# EAGLE board Artembed-Panel (EAGLE 9.5.0), part 1 of 3
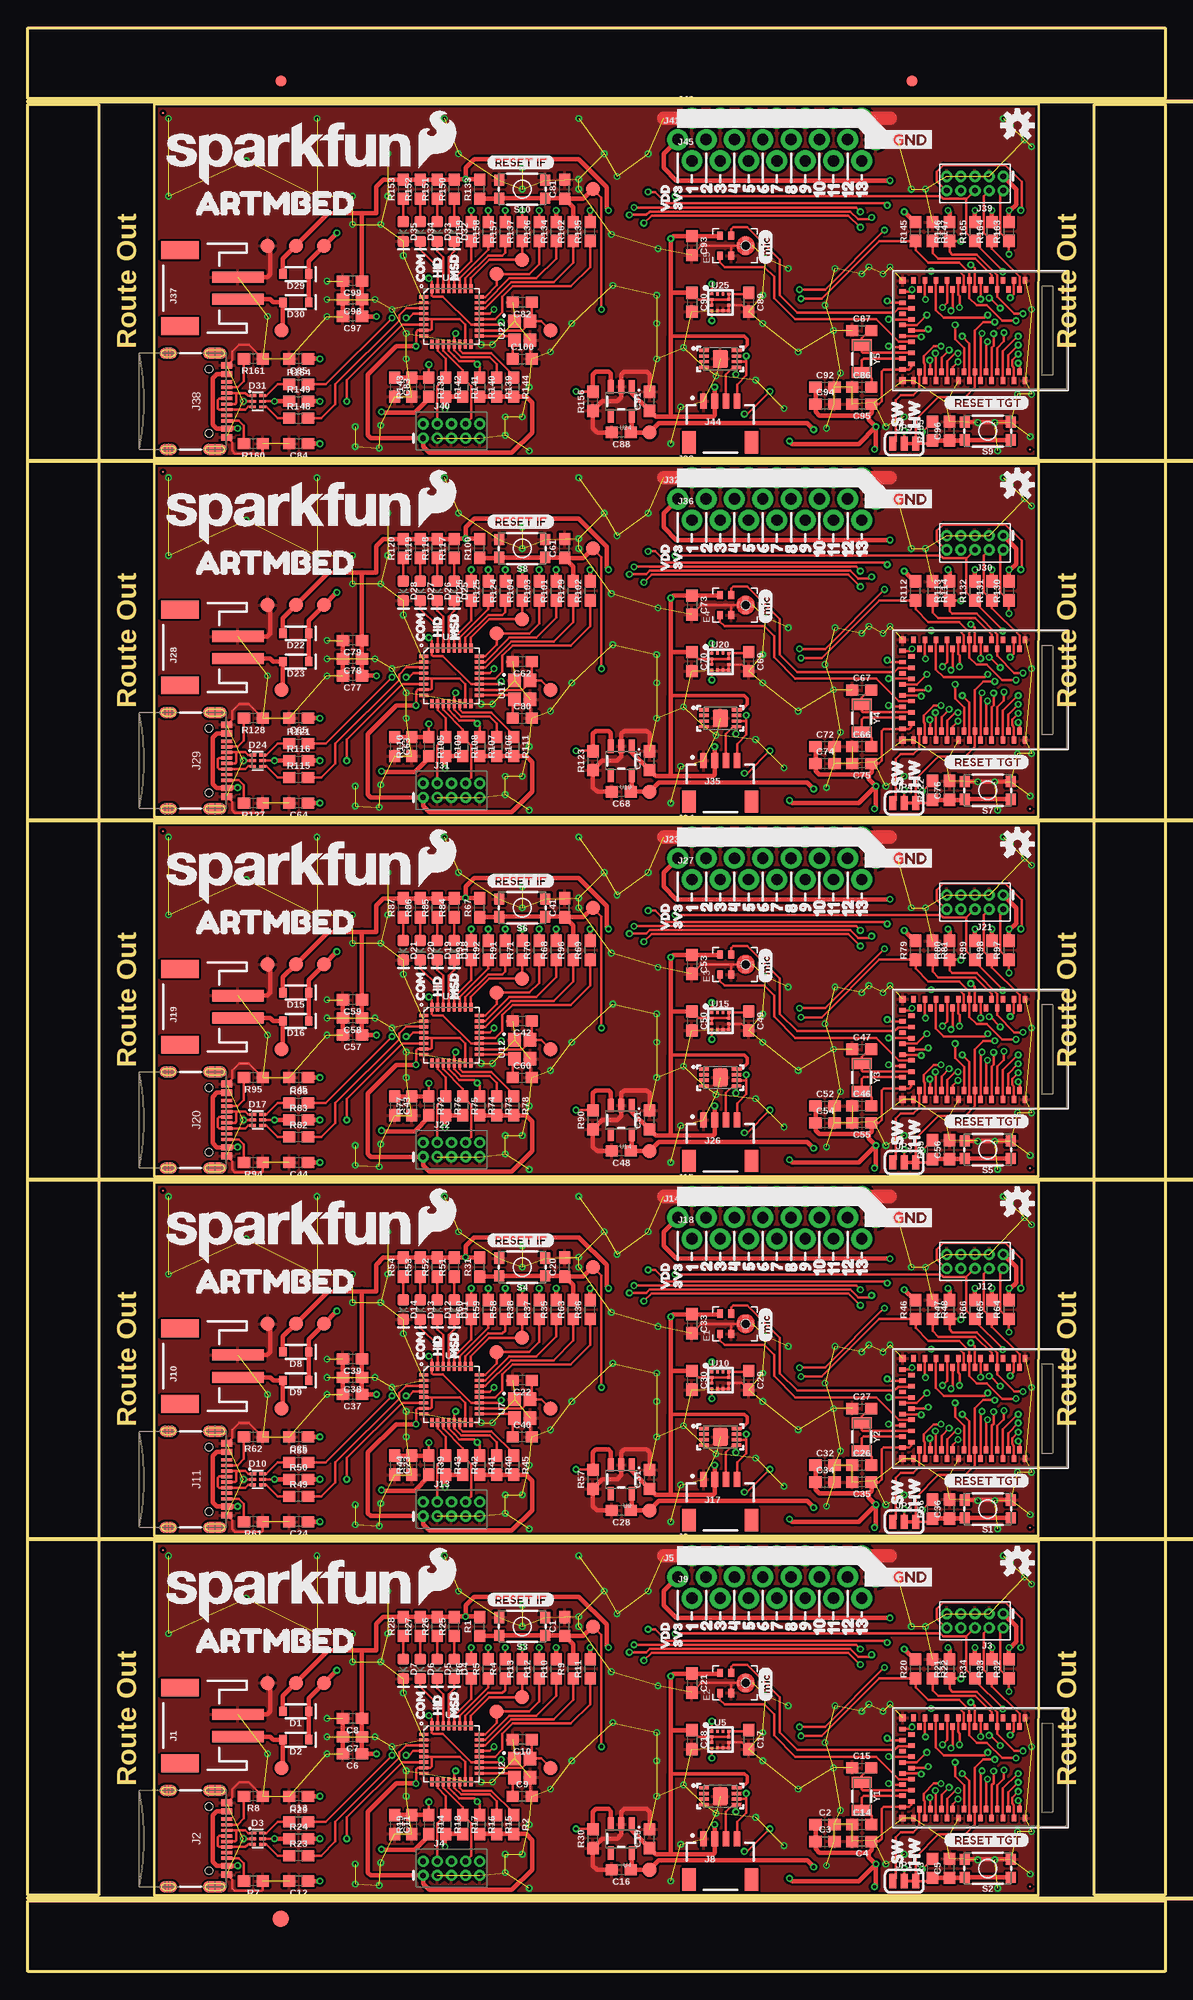
[diagram p0: board, top side]
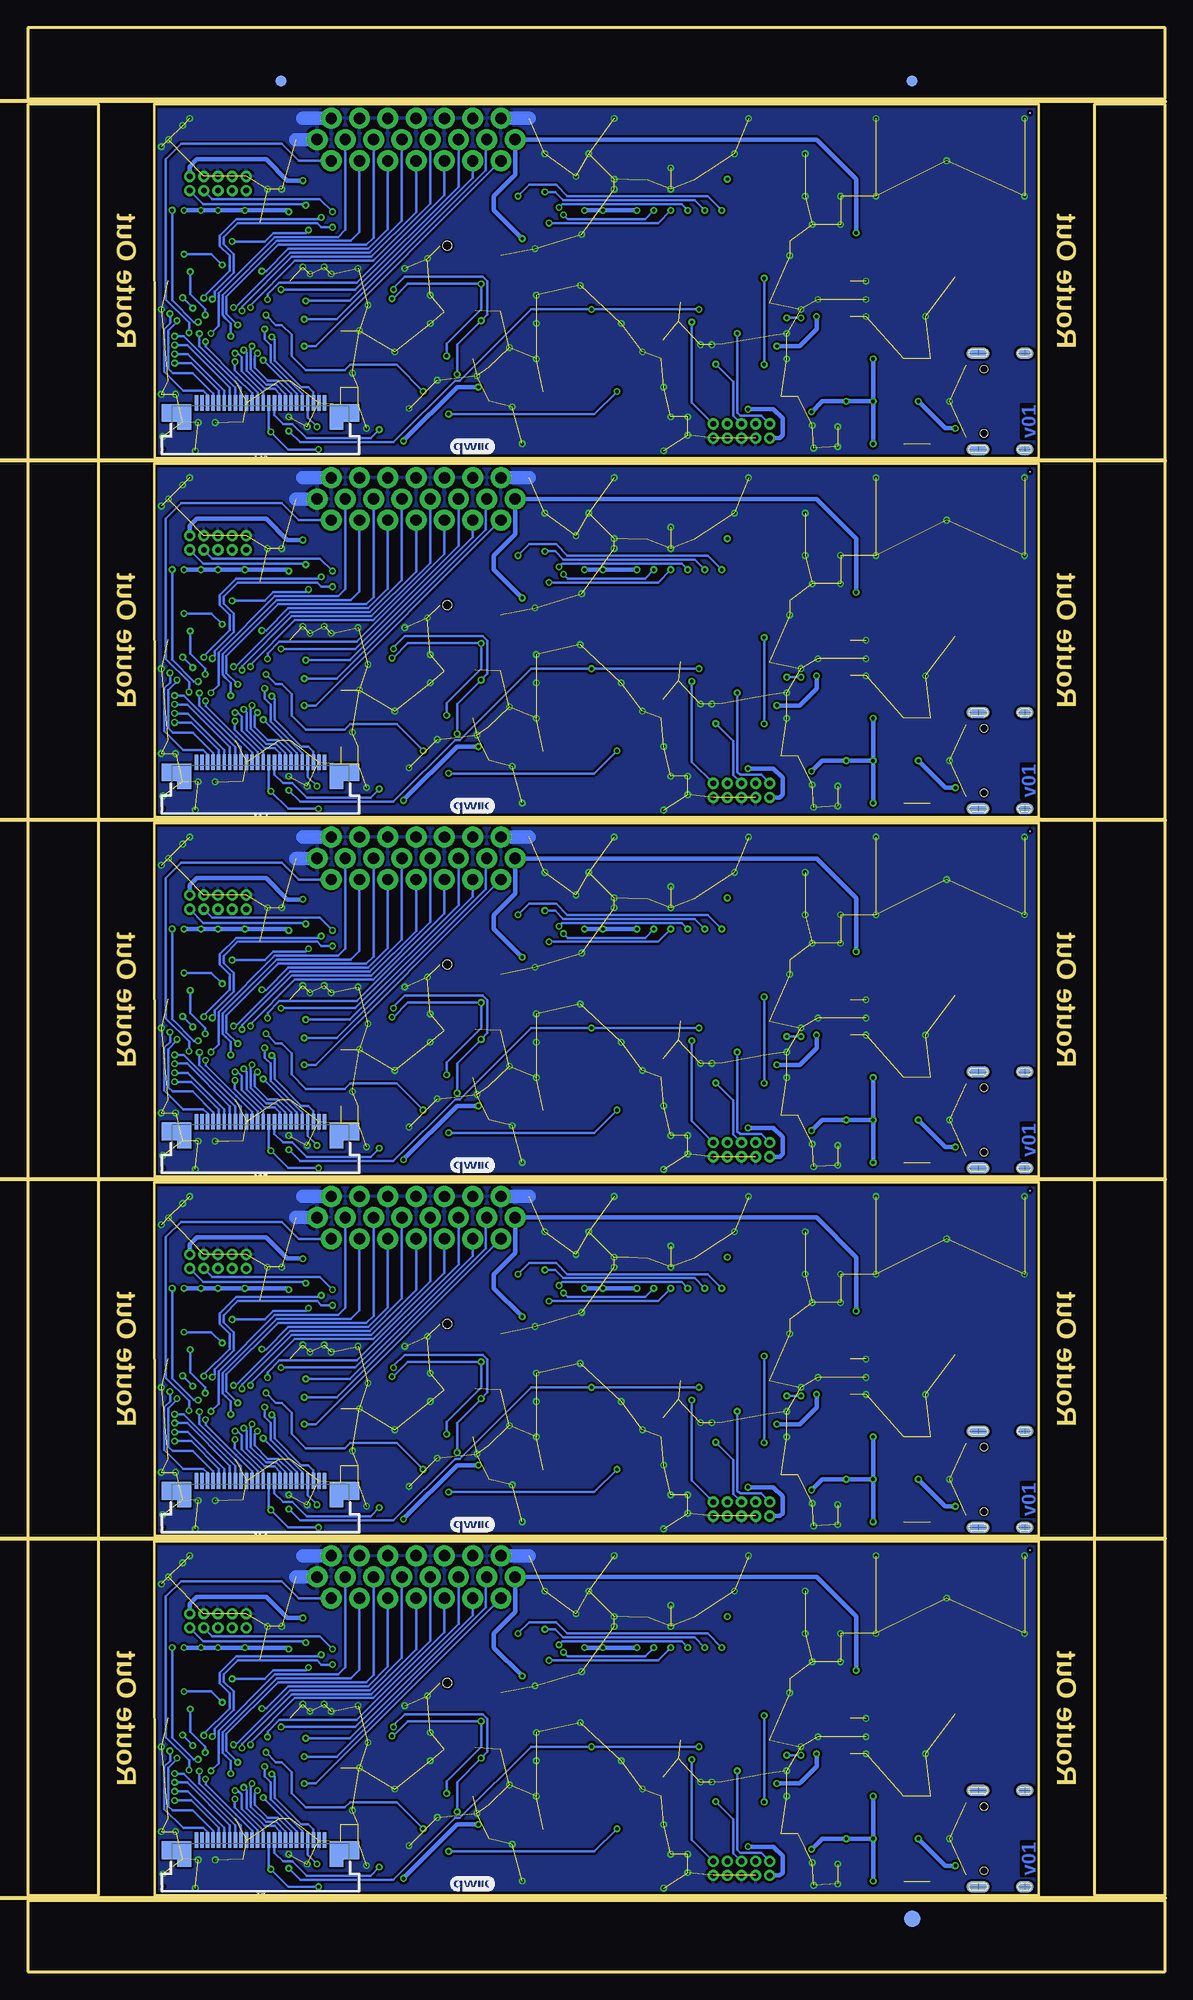
[diagram p1: board, bottom side, seen from below]

Size 102.07 x 174.51 mm. Coordinates in mm from the lower left corner, seen from the top.
Outline: 11.35,6.86 90.7,6.86 90.72,38.61 11.36,38.61 11.35,6.86
Outline: 11.35,39.12 90.7,39.12 90.72,70.87 11.36,70.87 11.35,39.12
Outline: 11.35,71.38 90.7,71.38 90.72,103.13 11.36,103.13 11.35,71.38
Outline: 11.35,103.64 90.7,103.64 90.72,135.39 11.36,135.39 11.35,103.64
Outline: 11.35,135.9 90.7,135.9 90.72,167.65 11.36,167.65 11.35,135.9
Outline: 0,6.35 102.07,6.35 102.07,0 0,0 0,6.35
Outline: 95.72,167.65 102.07,167.65 102.07,6.86 95.72,6.86 95.72,167.65
Outline: 0,174.51 102.07,174.51 102.07,168.16 0,168.16 0,174.51
Outline: 0,167.65 6.35,167.65 6.35,6.86 0,6.86 0,167.65
Copper layers (1*16): Top 0.035mm / dielectric 1.5mm / Bottom 0.035mm
Design rules "SparkFun-2-layer-PCBWay-LIMIT": minimum track width 6mil, minimum drill 0.3mm, track to track 6mil, track to pad 6mil, pad to pad 6mil, via to via 6mil, smd to smd 6mil, copper to edge 6mil, drill to drill 6mil, minimum pad ring 6mil, minimum via ring 6mil, stop-mask expansion 4mil, vias tented up to drill 25mil, thermal gap 10mil
Milling: 6 lines

## Footprints (pad centres in the part's own frame; a part is rotated, then mirrored left to right if it is on the bottom)
0603 = smd 1.1 x 1: 1 -0.85,0; 2 0.85,0
SOD-323 = smd 0.63 x 0.83: A 1.15,0; C -1.15,0
SOT886 = smd 0.61 x 0.25: 1 -0.405,0.5 | smd 0.56 x 0.25: 2 -0.43,0; 3 -0.43,-0.5; 4 0.43,-0.5; 5 0.43,0; 6 0.43,0.5
LED-0603 = smd 1 x 1: A -0.877,0; C 0.877,0
SPH0641LM4H-1_MICROPHONE = smd 0.725 x 0.522: 1 -0.9,1.3; 2 -0.9,0.3; 4 0.9,0.3; 5 0.9,1.3 | smd 0.5 x 0.2: 3 0,-1.65; 8 0,-0.35 | smd 0.2 x 0.5: 6 -0.65,-1; 7 0.65,-1 | hole 0.8: 0,-1
FIDUCIAL-1X2 = smd 1 x 1: 1 0,0
FIDUCIAL-1.5X3 = smd 1.5 x 1.5: 1 0,0
UDFN_2X3MM = smd 0.3 x 0.85: 1 -0.75,-1.45; 2 -0.25,-1.45; 3 0.25,-1.45; 4 0.75,-1.45; 5 0.75,1.45; 6 0.25,1.45; 7 -0.25,1.45; 8 -0.75,1.45 | smd 1.6 x 1.4: P 0,0
FIDUCIAL-0.2MM = smd 0.2 x 0.2: 1 0,0
JST-2-SMD = smd 1 x 4.6: 1 -1,-3.7; 2 1,-3.7 | smd 1.6 x 3.4: NC1 -3.4,1.5; NC2 3.4,1.5
USB-C-16P = smd 0.3 x 1.016: A5 -1.25,0.154; A6 -0.25,0.154; A7 0.25,0.154; A8 1.25,0.154; B5 1.75,0.154; B6 0.75,0.154; B7 -0.75,0.154; B8 -1.75,0.154 | smd 0.6 x 1.016: GND -3.225,0.154; GND2 3.225,0.154 | smd 1 x 2.1: SHLD1 -4.32,-0.915; SHLD2 4.32,-0.915 | smd 1 x 2.1 bottom: SHLD3 -4.32,-0.915; SHLD4 4.32,-0.915 | smd 1 x 1.6: SHLD5 -4.32,-5.095; SHLD8 4.32,-5.095 | smd 1 x 1.6 bottom: SHLD6 -4.32,-5.095; SHLD7 4.32,-5.095 | smd 0.55 x 1.016: VBUS1 -2.45,0.154; VBUS2 2.45,0.154 | hole 0.65: -2.89,-1.445; 2.89,-1.445
2X5-PTH-1.27MM = drill 0.508 pad 1: 1 -2.54,-0.635; 2 -2.54,0.635; 3 -1.27,-0.635; 4 -1.27,0.635; 5 0,-0.635; 6 0,0.635; 7 1.27,-0.635; 8 1.27,0.635; 9 2.54,-0.635; 10 2.54,0.635
2X5-PTH-1.27MM-NO_SILK = drill 0.508 pad 1: 1 -2.54,-0.635; 2 -2.54,0.635; 3 -1.27,-0.635; 4 -1.27,0.635; 5 0,-0.635; 6 0,0.635; 7 1.27,-0.635; 8 1.27,0.635; 9 2.54,-0.635; 10 2.54,0.635
1X08_NO_SILK = drill 1.016 pad 1.88: 1 0,0; 2 2.54,0; 3 5.08,0; 4 7.62,0; 5 10.16,0; 6 12.7,0; 7 15.24,0; 8 17.78,0
1X07_NO_SILK = drill 1.016 pad 1.88: 1 0,0; 2 2.54,0; 3 5.08,0; 4 7.62,0; 5 10.16,0; 6 12.7,0; 7 15.24,0
FPC-24-AMPHENOL-SFV24R-1STE1HLF = smd 0.3 x 1.4: 1 5.75,2.4; 2 5.25,2.4; 3 4.75,2.4; 4 4.25,2.4; 5 3.75,2.4; 6 3.25,2.4; 7 2.75,2.4; 8 2.25,2.4; 9 1.75,2.4; 10 1.25,2.4; 11 0.75,2.4; 12 0.25,2.4; 13 -0.25,2.4; 14 -0.75,2.4; 15 -1.25,2.4; 16 -1.75,2.4; 17 -2.25,2.4; 18 -2.75,2.4; 19 -3.25,2.4; 20 -3.75,2.4; 21 -4.25,2.4; 22 -4.75,2.4; 23 -5.25,2.4; 24 -5.75,2.4 | smd 1.4 x 1.6: MNT1@0 -8.15,1.5; MNT2@1 8.15,1.5 | smd 1.25 x 2.3: MNT1@1 -6.825,1.15; MNT2@0 6.825,1.15
JST04_1MM_RA = smd 0.6 x 1.35: 1 -1.5,0; 2 -0.5,0; 3 0.5,0; 4 1.5,0 | smd 1.2 x 2: NC1 2.8,-3.675; NC2 -2.8,-3.675
SMT-JUMPER_3_1-NC_TRACE_SILK = smd 0.635 x 1.27: 1 -1.016,0; 2 0,0; 3 1.016,0
TACTILE_SWITCH_SMD_4.6X2.8MM = smd 0.9 x 1: 1 -2.05,-0.8; 2 2.05,-0.8; 3 2.05,0.8; 4 -2.05,0.8
PAD.03X.05 = smd 1.27 x 1.27: P$1 0,0
QFN-32-NOPAD = smd 0.285 x 0.8: 1 -1.75,-2.5; 2 -1.25,-2.5; 3 -0.75,-2.5; 4 -0.25,-2.5; 5 0.25,-2.5; 6 0.75,-2.5; 7 1.25,-2.5; 8 1.75,-2.5; 17 1.75,2.5; 18 1.25,2.5; 19 0.75,2.5; 20 0.25,2.5; 21 -0.25,2.5; 22 -0.75,2.5; 23 -1.25,2.5; 24 -1.75,2.5 | smd 0.8 x 0.285: 9 2.5,-1.75; 10 2.5,-1.25; 11 2.5,-0.75; 12 2.5,-0.25; 13 2.5,0.25; 14 2.5,0.75; 15 2.5,1.25; 16 2.5,1.75; 25 -2.5,1.75; 26 -2.5,1.25; 27 -2.5,0.75; 28 -2.5,0.25; 29 -2.5,-0.25; 30 -2.5,-0.75; 31 -2.5,-1.25; 32 -2.5,-1.75
CRYSTAL-SMD-2X2.5MM = smd 1.2 x 1.1: P1 -0.854,0.69; P2 0.846,0.69; P3 0.846,-0.71; P4 -0.854,-0.71
ARTEMIS_FP = smd 0.4 x 0.6: AD16 -4,-3.7; BOOT 1.5,4.5; D0 0.5,-4.5; D1 -0.5,-4.5; D2 -1,-3.7; D3 2,-3.7; D7 -1.5,4.5; D8 -0.5,4.5; D9 2,3.7; D10 1,3.7; D14 -5,3.7; D17 -3.5,-4.5; D36 2.5,-4.5; D38 3,-3.7; D40 2.5,4.5; D41 -2.5,-4.5; GND@1 4.5,4.5; GND@39 -5.5,-4.5; GND@47 -1.5,-4.5; GND@59 4.5,-4.5; RXI-0 3.5,4.5; SWDCK 4,3.7; SWDIO 0,3.7; TXO-0 0.5,4.5; ~AD31 -3,-3.7; ~AD35 -2,3.7; ~D4 -2.5,4.5; ~D5 -1,3.7; ~D18 -4.5,-4.5; ~D19 -5,-3.7; ~D22 -3.5,4.5; ~D23 -4,3.7; ~D24 -3,3.7; ~D27 -4.5,4.5; ~D28 -5.5,4.5; ~D37 3.5,-4.5; ~D39 3,3.7; ~D42 1.5,-4.5; ~D43 1,-3.7; ~D44 4,-3.7; ~D45 -2,-3.7; ~RST 0,-3.7 | smd 0.6 x 0.4: AD34 -6.5,-0.5; D15 -6.5,0.5; VDD@36 -5.7,-3; VDD@37 -6.5,-3.5; XI -6.5,-2.5; XO -5.7,-2; ~AD11 -5.7,-1; ~AD12 -5.7,2; ~AD13 -5.7,1; ~AD29 -6.5,-1.5; ~AD32 -5.7,3; ~AD33/SWO -5.7,0; ~D6 -6.5,3.5; ~D25 -6.5,2.5; ~D26 -6.5,1.5 | smd 0.6 x 0.6: GND@22 -6.5,4.5; GND@38 -6.5,-4.5
SOT23-5 = smd 0.55 x 1.2: 1 -0.95,-1.3; 2 0,-1.3; 3 0.95,-1.3; 4 0.95,1.3; 5 -0.95,1.3
LGA-12-LISDH12 = smd 0.275 x 0.25: 1 -0.75,0.75; 2 -0.75,0.25; 3 -0.75,-0.25; 4 -0.75,-0.75; 7 0.75,-0.75; 8 0.75,-0.25; 9 0.75,0.25; 10 0.75,0.75 | smd 0.25 x 0.275: 5 -0.25,-0.75; 6 0.25,-0.75; 11 0.25,0.75; 12 -0.25,0.75
CRYSTAL-SMD-3.2X1.5MM = smd 1 x 1.8: P$1 -1.25,0; P$2 1.25,0

## Placement (x,y rotation side)
C1  0.1uF  [0603]  48.18,30.99 90 top
C2  10uF  [0603]  71.55,13.21 0 top
C3  1.0uF  [0603]  71.55,11.69 0 top
C4  0.1uF  [0603]  74.85,11.69 180 top
C5  1nF  [0603]  82.72,9.27 90 top
C6  2.2uF  [0603]  29.13,19.56 180 top
C7  0.1uF  [0603]  29.13,21.08 180 top
C8  0.1uF  [0603]  29.13,22.74 180 top
C9  12pF  [0603]  44.37,15.75 0 top
C10  12pF  [0603]  44.37,20.83 180 top
C11  0.1uF  [0603]  32.94,13.21 270 top
C12  1.0uF  [0603]  24.3,8.13 180 top
C13  0.1uF  [0603]  24.3,15.75 180 top
C14  15pF  [0603]  74.85,13.21 0 top
C15  15pF  [0603]  74.85,18.29 0 top
C16  1.0uF  [0603]  53.26,9.15 180 top
C17  0.1uF  [0603]  64.69,20.83 270 top
C18  10uF  [0603]  59.61,20.83 270 top
C19  1.0uF  [0603]  55.8,11.94 90 top
C20  0.1uF  [0603]  48.18,63.25 90 top
C21  1.0uF  [0603]  59.61,25.91 270 top
C22  12pF  [0603]  44.37,53.09 180 top
C23  0.1uF  [0603]  32.94,45.47 270 top
C24  1.0uF  [0603]  24.3,40.39 180 top
C25  0.1uF  [0603]  24.3,48.01 180 top
C26  15pF  [0603]  74.85,45.47 0 top
C27  15pF  [0603]  74.85,50.55 0 top
C28  1.0uF  [0603]  53.26,41.41 180 top
C29  0.1uF  [0603]  64.69,53.09 270 top
C30  10uF  [0603]  59.61,53.09 270 top
C31  1.0uF  [0603]  55.8,44.2 90 top
C32  10uF  [0603]  71.55,45.47 0 top
C33  1.0uF  [0603]  59.61,58.17 270 top
C34  1.0uF  [0603]  71.55,43.95 0 top
C35  0.1uF  [0603]  74.85,43.95 180 top
C36  1nF  [0603]  82.72,41.53 90 top
C37  2.2uF  [0603]  29.13,51.82 180 top
C38  0.1uF  [0603]  29.13,53.34 180 top
C39  0.1uF  [0603]  29.13,55 180 top
C40  12pF  [0603]  44.37,48.01 0 top
C41  0.1uF  [0603]  48.18,95.51 90 top
C42  12pF  [0603]  44.37,85.35 180 top
C43  0.1uF  [0603]  32.94,77.73 270 top
C44  1.0uF  [0603]  24.3,72.65 180 top
C45  0.1uF  [0603]  24.3,80.27 180 top
C46  15pF  [0603]  74.85,77.73 0 top
C47  15pF  [0603]  74.85,82.81 0 top
C48  1.0uF  [0603]  53.26,73.67 180 top
C49  0.1uF  [0603]  64.69,85.35 270 top
C50  10uF  [0603]  59.61,85.35 270 top
C51  1.0uF  [0603]  55.8,76.46 90 top
C52  10uF  [0603]  71.55,77.73 0 top
C53  1.0uF  [0603]  59.61,90.43 270 top
C54  1.0uF  [0603]  71.55,76.21 0 top
C55  0.1uF  [0603]  74.85,76.21 180 top
C56  1nF  [0603]  82.72,73.79 90 top
C57  2.2uF  [0603]  29.13,84.08 180 top
C58  0.1uF  [0603]  29.13,85.6 180 top
C59  0.1uF  [0603]  29.13,87.25 180 top
C60  12pF  [0603]  44.37,80.27 0 top
C61  0.1uF  [0603]  48.18,127.77 90 top
C62  12pF  [0603]  44.37,117.61 180 top
C63  0.1uF  [0603]  32.94,109.99 270 top
C64  1.0uF  [0603]  24.3,104.91 180 top
C65  0.1uF  [0603]  24.3,112.53 180 top
C66  15pF  [0603]  74.85,109.99 0 top
C67  15pF  [0603]  74.85,115.07 0 top
C68  1.0uF  [0603]  53.26,105.93 180 top
C69  0.1uF  [0603]  64.69,117.61 270 top
C70  10uF  [0603]  59.61,117.61 270 top
C71  1.0uF  [0603]  55.8,108.72 90 top
C72  10uF  [0603]  71.55,109.99 0 top
C73  1.0uF  [0603]  59.61,122.69 270 top
C74  1.0uF  [0603]  71.55,108.47 0 top
C75  0.1uF  [0603]  74.85,108.47 180 top
C76  1nF  [0603]  82.72,106.05 90 top
C77  2.2uF  [0603]  29.13,116.34 180 top
C78  0.1uF  [0603]  29.13,117.86 180 top
C79  0.1uF  [0603]  29.13,119.52 180 top
C80  12pF  [0603]  44.37,112.53 0 top
C81  0.1uF  [0603]  48.18,160.03 90 top
C82  12pF  [0603]  44.37,149.87 180 top
C83  0.1uF  [0603]  32.94,142.25 270 top
C84  1.0uF  [0603]  24.3,137.17 180 top
C85  0.1uF  [0603]  24.3,144.79 180 top
C86  15pF  [0603]  74.85,142.25 0 top
C87  15pF  [0603]  74.85,147.33 0 top
C88  1.0uF  [0603]  53.26,138.19 180 top
C89  0.1uF  [0603]  64.69,149.87 270 top
C90  10uF  [0603]  59.61,149.87 270 top
C91  1.0uF  [0603]  55.8,140.98 90 top
C92  10uF  [0603]  71.55,142.25 0 top
C93  1.0uF  [0603]  59.61,154.95 270 top
C94  1.0uF  [0603]  71.55,140.73 0 top
C95  0.1uF  [0603]  74.85,140.73 180 top
C96  1nF  [0603]  82.72,138.31 90 top
C97  2.2uF  [0603]  29.13,148.6 180 top
C98  0.1uF  [0603]  29.13,150.12 180 top
C99  0.1uF  [0603]  29.13,151.78 180 top
C100  12pF  [0603]  44.37,144.79 0 top
D1  3A/10V/280mV  [SOD-323]  24.05,23.37 180 top
D2  3A/10V/280mV  [SOD-323]  24.05,20.83 180 top
D3  PRTR5V0U2F  [SOT886]  20.62,11.94 0 top
D4  BLUE  [LED-0603]  38.27,27.18 270 top
D5  GREEN  [LED-0603]  36.75,27.18 270 top
D6  Yellow  [LED-0603]  35.23,27.18 270 top
D7  RED  [LED-0603]  33.7,27.18 270 top
D8  3A/10V/280mV  [SOD-323]  24.05,55.63 180 top
D9  3A/10V/280mV  [SOD-323]  24.05,53.09 180 top
D10  PRTR5V0U2F  [SOT886]  20.62,44.2 0 top
D11  BLUE  [LED-0603]  38.27,59.44 270 top
D12  GREEN  [LED-0603]  36.75,59.44 270 top
D13  Yellow  [LED-0603]  35.23,59.44 270 top
D14  RED  [LED-0603]  33.7,59.44 270 top
D15  3A/10V/280mV  [SOD-323]  24.05,87.89 180 top
D16  3A/10V/280mV  [SOD-323]  24.05,85.35 180 top
D17  PRTR5V0U2F  [SOT886]  20.62,76.46 0 top
D18  BLUE  [LED-0603]  38.27,91.7 270 top
D19  GREEN  [LED-0603]  36.75,91.7 270 top
D20  Yellow  [LED-0603]  35.23,91.7 270 top
D21  RED  [LED-0603]  33.7,91.7 270 top
D22  3A/10V/280mV  [SOD-323]  24.05,120.15 180 top
D23  3A/10V/280mV  [SOD-323]  24.05,117.61 180 top
D24  PRTR5V0U2F  [SOT886]  20.62,108.72 0 top
D25  BLUE  [LED-0603]  38.27,123.96 270 top
D26  GREEN  [LED-0603]  36.75,123.96 270 top
D27  Yellow  [LED-0603]  35.23,123.96 270 top
D28  RED  [LED-0603]  33.7,123.96 270 top
D29  3A/10V/280mV  [SOD-323]  24.05,152.41 180 top
D30  3A/10V/280mV  [SOD-323]  24.05,149.87 180 top
D31  PRTR5V0U2F  [SOT886]  20.62,140.98 0 top
D32  BLUE  [LED-0603]  38.27,156.22 270 top
D33  GREEN  [LED-0603]  36.75,156.22 270 top
D34  Yellow  [LED-0603]  35.23,156.22 270 top
D35  RED  [LED-0603]  33.7,156.22 270 top
E1  SPH0641LM4H-1  [SPH0641LM4H-1_MICROPHONE]  63.42,58.17 90 top
E2  SPH0641LM4H-1  [SPH0641LM4H-1_MICROPHONE]  63.42,25.91 90 top
E3  SPH0641LM4H-1  [SPH0641LM4H-1_MICROPHONE]  63.42,90.43 90 top
E4  SPH0641LM4H-1  [SPH0641LM4H-1_MICROPHONE]  63.42,122.69 90 top
E5  SPH0641LM4H-1  [SPH0641LM4H-1_MICROPHONE]  63.42,154.95 90 top
E$1  [FIDUCIAL-1X2]  22.7,169.75 0 top
E$2  [FIDUCIAL-1X2]  22.7,169.75 0 bottom
E$3  [FIDUCIAL-1X2]  79.38,169.75 0 top
E$4  [FIDUCIAL-1X2]  79.38,169.75 0 bottom
E$5  [FIDUCIAL-1.5X3]  22.7,4.76 0 top
E$6  [FIDUCIAL-1.5X3]  22.7,4.76 0 bottom
ECC1  ATECC508AUDFN_2X3MM  [UDFN_2X3MM]  62.15,15.75 270 top
ECC2  ATECC508AUDFN_2X3MM  [UDFN_2X3MM]  62.15,48.01 270 top
ECC3  ATECC508AUDFN_2X3MM  [UDFN_2X3MM]  62.15,80.27 270 top
ECC4  ATECC508AUDFN_2X3MM  [UDFN_2X3MM]  62.15,112.53 270 top
ECC5  ATECC508AUDFN_2X3MM  [UDFN_2X3MM]  62.15,144.79 270 top
FD1  FIDUCIAL0.2MM  [FIDUCIAL-0.2MM]  12.11,37.85 0 bottom
FD2  FIDUCIAL0.2MM  [FIDUCIAL-0.2MM]  89.96,7.62 0 bottom
FD3  FIDUCIAL0.2MM  [FIDUCIAL-0.2MM]  89.96,7.62 0 top
FD4  FIDUCIAL0.2MM  [FIDUCIAL-0.2MM]  12.11,37.85 0 top
FD5  FIDUCIAL0.2MM  [FIDUCIAL-0.2MM]  12.11,70.11 0 bottom
FD6  FIDUCIAL0.2MM  [FIDUCIAL-0.2MM]  89.96,39.88 0 bottom
FD7  FIDUCIAL0.2MM  [FIDUCIAL-0.2MM]  89.96,39.88 0 top
FD8  FIDUCIAL0.2MM  [FIDUCIAL-0.2MM]  12.11,70.11 0 top
FD9  FIDUCIAL0.2MM  [FIDUCIAL-0.2MM]  12.11,102.37 0 bottom
FD10  FIDUCIAL0.2MM  [FIDUCIAL-0.2MM]  89.96,72.14 0 bottom
FD11  FIDUCIAL0.2MM  [FIDUCIAL-0.2MM]  89.96,72.14 0 top
FD12  FIDUCIAL0.2MM  [FIDUCIAL-0.2MM]  12.11,102.37 0 top
FD13  FIDUCIAL0.2MM  [FIDUCIAL-0.2MM]  12.11,134.63 0 bottom
FD14  FIDUCIAL0.2MM  [FIDUCIAL-0.2MM]  89.96,104.4 0 bottom
FD15  FIDUCIAL0.2MM  [FIDUCIAL-0.2MM]  89.96,104.4 0 top
FD16  FIDUCIAL0.2MM  [FIDUCIAL-0.2MM]  12.11,134.63 0 top
FD17  FIDUCIAL0.2MM  [FIDUCIAL-0.2MM]  12.11,166.89 0 bottom
FD18  FIDUCIAL0.2MM  [FIDUCIAL-0.2MM]  89.96,136.66 0 bottom
FD19  FIDUCIAL0.2MM  [FIDUCIAL-0.2MM]  89.96,136.66 0 top
FD20  FIDUCIAL0.2MM  [FIDUCIAL-0.2MM]  12.11,166.89 0 top
J1  [JST-2-SMD]  15.16,22.1 90 top
J2  [USB-C-16P]  17.7,11.94 270 top
J3  CORTEX_JTAG_DEBUG_MINIMUM_PTH  [2X5-PTH-1.27MM]  85.01,31.5 180 top
J4  CORTEX_JTAG_DEBUG_PTH_NS  [2X5-PTH-1.27MM-NO_SILK]  38.02,9.27 0 top
J5  [1X08_NO_SILK]  58.34,35.44 0 top
J6  [1X07_NO_SILK]  59.61,37.34 0 top
J7  CAMERA-HIMAX  [FPC-24-AMPHENOL-SFV24R-1STE1HLF]  81.2,9.4 0 bottom
J8  [JST04_1MM_RA]  62.15,11.94 0 top
J9  [1X07_NO_SILK]  59.61,33.53 0 top
J10  [JST-2-SMD]  15.16,54.36 90 top
J11  [USB-C-16P]  17.7,44.2 270 top
J12  CORTEX_JTAG_DEBUG_MINIMUM_PTH  [2X5-PTH-1.27MM]  85.01,63.76 180 top
J13  CORTEX_JTAG_DEBUG_PTH_NS  [2X5-PTH-1.27MM-NO_SILK]  38.02,41.53 0 top
J14  [1X08_NO_SILK]  58.34,67.7 0 top
J15  [1X07_NO_SILK]  59.61,69.6 0 top
J16  CAMERA-HIMAX  [FPC-24-AMPHENOL-SFV24R-1STE1HLF]  81.2,41.66 0 bottom
J17  [JST04_1MM_RA]  62.15,44.2 0 top
J18  [1X07_NO_SILK]  59.61,65.79 0 top
J19  [JST-2-SMD]  15.16,86.62 90 top
J20  [USB-C-16P]  17.7,76.46 270 top
J21  CORTEX_JTAG_DEBUG_MINIMUM_PTH  [2X5-PTH-1.27MM]  85.01,96.02 180 top
J22  CORTEX_JTAG_DEBUG_PTH_NS  [2X5-PTH-1.27MM-NO_SILK]  38.02,73.79 0 top
J23  [1X08_NO_SILK]  58.34,99.95 0 top
J24  [1X07_NO_SILK]  59.61,101.86 0 top
J25  CAMERA-HIMAX  [FPC-24-AMPHENOL-SFV24R-1STE1HLF]  81.2,73.92 0 bottom
J26  [JST04_1MM_RA]  62.15,76.46 0 top
J27  [1X07_NO_SILK]  59.61,98.05 0 top
J28  [JST-2-SMD]  15.16,118.88 90 top
J29  [USB-C-16P]  17.7,108.72 270 top
J30  CORTEX_JTAG_DEBUG_MINIMUM_PTH  [2X5-PTH-1.27MM]  85.01,128.28 180 top
J31  CORTEX_JTAG_DEBUG_PTH_NS  [2X5-PTH-1.27MM-NO_SILK]  38.02,106.05 0 top
J32  [1X08_NO_SILK]  58.34,132.22 0 top
J33  [1X07_NO_SILK]  59.61,134.12 0 top
J34  CAMERA-HIMAX  [FPC-24-AMPHENOL-SFV24R-1STE1HLF]  81.2,106.18 0 bottom
J35  [JST04_1MM_RA]  62.15,108.72 0 top
J36  [1X07_NO_SILK]  59.61,130.31 0 top
J37  [JST-2-SMD]  15.16,151.14 90 top
J38  [USB-C-16P]  17.7,140.98 270 top
J39  CORTEX_JTAG_DEBUG_MINIMUM_PTH  [2X5-PTH-1.27MM]  85.01,160.54 180 top
J40  CORTEX_JTAG_DEBUG_PTH_NS  [2X5-PTH-1.27MM-NO_SILK]  38.02,138.31 0 top
J41  [1X08_NO_SILK]  58.34,164.48 0 top
J42  [1X07_NO_SILK]  59.61,166.38 0 top
J43  CAMERA-HIMAX  [FPC-24-AMPHENOL-SFV24R-1STE1HLF]  81.2,138.44 0 bottom
J44  [JST04_1MM_RA]  62.15,140.98 0 top
J45  [1X07_NO_SILK]  59.61,162.57 0 top
JP1  HW/SW RESET  [SMT-JUMPER_3_1-NC_TRACE_SILK]  78.66,8.13 0 top
JP2  HW/SW RESET  [SMT-JUMPER_3_1-NC_TRACE_SILK]  78.66,40.39 0 top
JP3  HW/SW RESET  [SMT-JUMPER_3_1-NC_TRACE_SILK]  78.66,72.65 0 top
JP4  HW/SW RESET  [SMT-JUMPER_3_1-NC_TRACE_SILK]  78.66,104.91 0 top
JP5  HW/SW RESET  [SMT-JUMPER_3_1-NC_TRACE_SILK]  78.66,137.17 0 top
LOGO1  OSHW-LOGOS  [OSHW-LOGO-S]  88.82,36.71 0 top
LOGO2  SFE_LOGO_NAME.2_INCH  [SFE_LOGO_NAME_.2]  23.41,34.17 0 top
LOGO3  OSHW-LOGOS  [OSHW-LOGO-S]  88.82,68.97 0 top
LOGO4  SFE_LOGO_NAME.2_INCH  [SFE_LOGO_NAME_.2]  23.41,66.43 0 top
LOGO5  OSHW-LOGOS  [OSHW-LOGO-S]  88.82,101.22 0 top
LOGO6  SFE_LOGO_NAME.2_INCH  [SFE_LOGO_NAME_.2]  23.41,98.68 0 top
LOGO7  OSHW-LOGOS  [OSHW-LOGO-S]  88.82,133.49 0 top
LOGO8  SFE_LOGO_NAME.2_INCH  [SFE_LOGO_NAME_.2]  23.41,130.94 0 top
LOGO9  OSHW-LOGOS  [OSHW-LOGO-S]  88.82,165.75 0 top
LOGO10  SFE_LOGO_NAME.2_INCH  [SFE_LOGO_NAME_.2]  23.41,163.21 0 top
R1  10k  [0603]  40.56,30.99 90 top
R2  10k  [0603]  43.61,13.21 270 top
R3  10k  [0603]  81.2,9.27 90 top
R4  0  [0603]  42.85,27.18 90 top
R5  0  [0603]  41.32,27.18 90 top
R6  0  [0603]  39.8,27.18 90 top
R7  5.1k  [0603]  20.24,8.13 180 top
R8  5.1k  [0603]  20.24,15.75 180 top
R9  0  [0603]  48.94,27.18 90 top
R10  DNP  [0603]  47.42,27.18 90 top
R11  DNP  [0603]  50.47,27.18 90 top
R12  0  [0603]  45.89,27.18 90 top
R13  0  [0603]  44.37,27.18 90 top
R14  5.62k  [0603]  35.99,13.21 270 top
R15  DNP  [0603]  42.08,13.21 270 top
R16  DNP  [0603]  40.56,13.21 270 top
R17  DNP  [0603]  39.04,13.21 270 top
R18  DNP  [0603]  37.51,13.21 270 top
R19  10k  [0603]  34.46,13.21 90 top
R20  2.2k  [0603]  79.68,27.18 90 top
R21  2.2k  [0603]  82.72,27.18 90 top
R22  10k  [0603]  81.2,27.18 270 top
R23  33  [0603]  24.3,10.42 0 top
R24  10  [0603]  24.3,11.94 0 top
R25  330  [0603]  38.27,30.99 90 top
R26  330  [0603]  36.75,30.99 90 top
R27  330  [0603]  35.23,30.99 90 top
R28  330  [0603]  33.7,30.99 90 top
R29  33  [0603]  24.3,13.46 0 top
R30  10k  [0603]  50.72,11.94 90 top
R31  10k  [0603]  40.56,63.25 90 top
R32  DNP  [0603]  88.06,27.18 90 top
R33  DNP  [0603]  86.53,27.18 90 top
R34  DNP  [0603]  85.01,27.18 90 top
R35  DNP  [0603]  47.42,59.44 90 top
R36  DNP  [0603]  50.47,59.44 90 top
R37  0  [0603]  45.89,59.44 90 top
R38  0  [0603]  44.37,59.44 90 top
R39  5.62k  [0603]  35.99,45.47 270 top
R40  DNP  [0603]  42.08,45.47 270 top
R41  DNP  [0603]  40.56,45.47 270 top
R42  DNP  [0603]  39.04,45.47 270 top
R43  DNP  [0603]  37.51,45.47 270 top
R44  10k  [0603]  34.46,45.47 90 top
R45  10k  [0603]  43.61,45.47 270 top
R46  2.2k  [0603]  79.68,59.44 90 top
R47  2.2k  [0603]  82.72,59.44 90 top
R48  10k  [0603]  81.2,59.44 270 top
R49  33  [0603]  24.3,42.68 0 top
R50  10  [0603]  24.3,44.2 0 top
R51  330  [0603]  38.27,63.25 90 top
R52  330  [0603]  36.75,63.25 90 top
R53  330  [0603]  35.23,63.25 90 top
R54  330  [0603]  33.7,63.25 90 top
R55  33  [0603]  24.3,45.72 0 top
R56  10k  [0603]  81.2,41.53 90 top
R57  10k  [0603]  50.72,44.2 90 top
R58  0  [0603]  42.85,59.44 90 top
R59  0  [0603]  41.32,59.44 90 top
R60  0  [0603]  39.8,59.44 90 top
R61  5.1k  [0603]  20.24,40.39 180 top
R62  5.1k  [0603]  20.24,48.01 180 top
R63  0  [0603]  48.94,59.44 90 top
R64  DNP  [0603]  88.06,59.44 90 top
R65  DNP  [0603]  86.53,59.44 90 top
R66  DNP  [0603]  85.01,59.44 90 top
R67  10k  [0603]  40.56,95.51 90 top
R68  DNP  [0603]  47.42,91.7 90 top
R69  DNP  [0603]  50.47,91.7 90 top
R70  0  [0603]  45.89,91.7 90 top
R71  0  [0603]  44.37,91.7 90 top
R72  5.62k  [0603]  35.99,77.73 270 top
R73  DNP  [0603]  42.08,77.73 270 top
R74  DNP  [0603]  40.56,77.73 270 top
R75  DNP  [0603]  39.04,77.73 270 top
R76  DNP  [0603]  37.51,77.73 270 top
R77  10k  [0603]  34.46,77.73 90 top
R78  10k  [0603]  43.61,77.73 270 top
R79  2.2k  [0603]  79.68,91.7 90 top
R80  2.2k  [0603]  82.72,91.7 90 top
R81  10k  [0603]  81.2,91.7 270 top
R82  33  [0603]  24.3,74.94 0 top
R83  10  [0603]  24.3,76.46 0 top
R84  330  [0603]  38.27,95.51 90 top
R85  330  [0603]  36.75,95.51 90 top
R86  330  [0603]  35.23,95.51 90 top
R87  330  [0603]  33.7,95.51 90 top
R88  33  [0603]  24.3,77.98 0 top
R89  10k  [0603]  81.2,73.79 90 top
R90  10k  [0603]  50.72,76.46 90 top
R91  0  [0603]  42.85,91.7 90 top
R92  0  [0603]  41.32,91.7 90 top
R93  0  [0603]  39.8,91.7 90 top
R94  5.1k  [0603]  20.24,72.65 180 top
R95  5.1k  [0603]  20.24,80.27 180 top
R96  0  [0603]  48.94,91.7 90 top
R97  DNP  [0603]  88.06,91.7 90 top
R98  DNP  [0603]  86.53,91.7 90 top
R99  DNP  [0603]  85.01,91.7 90 top
R100  10k  [0603]  40.56,127.77 90 top
R101  DNP  [0603]  47.42,123.96 90 top
R102  DNP  [0603]  50.47,123.96 90 top
R103  0  [0603]  45.89,123.96 90 top
R104  0  [0603]  44.37,123.96 90 top
R105  5.62k  [0603]  35.99,109.99 270 top
R106  DNP  [0603]  42.08,109.99 270 top
R107  DNP  [0603]  40.56,109.99 270 top
R108  DNP  [0603]  39.04,109.99 270 top
R109  DNP  [0603]  37.51,109.99 270 top
R110  10k  [0603]  34.46,109.99 90 top
R111  10k  [0603]  43.61,109.99 270 top
R112  2.2k  [0603]  79.68,123.96 90 top
R113  2.2k  [0603]  82.72,123.96 90 top
R114  10k  [0603]  81.2,123.96 270 top
R115  33  [0603]  24.3,107.2 0 top
R116  10  [0603]  24.3,108.72 0 top
R117  330  [0603]  38.27,127.77 90 top
R118  330  [0603]  36.75,127.77 90 top
R119  330  [0603]  35.23,127.77 90 top
R120  330  [0603]  33.7,127.77 90 top
R121  33  [0603]  24.3,110.24 0 top
R122  10k  [0603]  81.2,106.05 90 top
R123  10k  [0603]  50.72,108.72 90 top
R124  0  [0603]  42.85,123.96 90 top
R125  0  [0603]  41.32,123.96 90 top
R126  0  [0603]  39.8,123.96 90 top
R127  5.1k  [0603]  20.24,104.91 180 top
R128  5.1k  [0603]  20.24,112.53 180 top
R129  0  [0603]  48.94,123.96 90 top
R130  DNP  [0603]  88.06,123.96 90 top
R131  DNP  [0603]  86.53,123.96 90 top
R132  DNP  [0603]  85.01,123.96 90 top
R133  10k  [0603]  40.56,160.03 90 top
R134  DNP  [0603]  47.42,156.22 90 top
R135  DNP  [0603]  50.47,156.22 90 top
R136  0  [0603]  45.89,156.22 90 top
R137  0  [0603]  44.37,156.22 90 top
R138  5.62k  [0603]  35.99,142.25 270 top
R139  DNP  [0603]  42.08,142.25 270 top
R140  DNP  [0603]  40.56,142.25 270 top
R141  DNP  [0603]  39.04,142.25 270 top
R142  DNP  [0603]  37.51,142.25 270 top
R143  10k  [0603]  34.46,142.25 90 top
R144  10k  [0603]  43.61,142.25 270 top
R145  2.2k  [0603]  79.68,156.22 90 top
R146  2.2k  [0603]  82.72,156.22 90 top
R147  10k  [0603]  81.2,156.22 270 top
R148  33  [0603]  24.3,139.46 0 top
R149  10  [0603]  24.3,140.98 0 top
R150  330  [0603]  38.27,160.03 90 top
R151  330  [0603]  36.75,160.03 90 top
R152  330  [0603]  35.23,160.03 90 top
R153  330  [0603]  33.7,160.03 90 top
R154  33  [0603]  24.3,142.5 0 top
R155  10k  [0603]  81.2,138.31 90 top
R156  10k  [0603]  50.72,140.98 90 top
R157  0  [0603]  42.85,156.22 90 top
R158  0  [0603]  41.32,156.22 90 top
R159  0  [0603]  39.8,156.22 90 top
R160  5.1k  [0603]  20.24,137.17 180 top
R161  5.1k  [0603]  20.24,144.79 180 top
R162  0  [0603]  48.94,156.22 90 top
R163  DNP  [0603]  88.06,156.22 90 top
R164  DNP  [0603]  86.53,156.22 90 top
R165  DNP  [0603]  85.01,156.22 90 top
S1  RESET TGT  [TACTILE_SWITCH_SMD_4.6X2.8MM]  86.15,41.53 180 top
S2  RESET TGT  [TACTILE_SWITCH_SMD_4.6X2.8MM]  86.15,9.27 180 top
S3  RESET IF  [TACTILE_SWITCH_SMD_4.6X2.8MM]  44.37,30.99 180 top
S4  RESET IF  [TACTILE_SWITCH_SMD_4.6X2.8MM]  44.37,63.25 180 top
S5  RESET TGT  [TACTILE_SWITCH_SMD_4.6X2.8MM]  86.15,73.79 180 top
S6  RESET IF  [TACTILE_SWITCH_SMD_4.6X2.8MM]  44.37,95.51 180 top
S7  RESET TGT  [TACTILE_SWITCH_SMD_4.6X2.8MM]  86.15,106.05 180 top
S8  RESET IF  [TACTILE_SWITCH_SMD_4.6X2.8MM]  44.37,127.77 180 top
S9  RESET TGT  [TACTILE_SWITCH_SMD_4.6X2.8MM]  86.15,138.31 180 top
S10  RESET IF  [TACTILE_SWITCH_SMD_4.6X2.8MM]  44.37,160.03 180 top
TP1  TEST-POINT3X5  [PAD.03X.05]  55.8,9.15 180 top
TP2  TEST-POINT3X5  [PAD.03X.05]  55.8,41.41 180 top
TP3  [PAD.03X.05]  42.08,23.37 0 top
TP4  [PAD.03X.05]  44.37,24.64 0 top
TP5  [PAD.03X.05]  46.91,18.29 0 top
TP6  [PAD.03X.05]  26.59,58.17 0 top
TP7  [PAD.03X.05]  50.72,63.25 0 top
TP8  [PAD.03X.05]  22.78,50.55 0 top
TP9  [PAD.03X.05]  21.51,25.91 0 top
TP10  [PAD.03X.05]  26.59,25.91 0 top
TP11  [PAD.03X.05]  50.72,30.99 0 top
TP12  [PAD.03X.05]  22.78,18.29 0 top
TP13  [PAD.03X.05]  24.05,25.91 0 top
TP14  [PAD.03X.05]  24.05,58.17 0 top
TP15  [PAD.03X.05]  42.08,55.63 0 top
TP16  [PAD.03X.05]  44.37,56.9 0 top
TP17  [PAD.03X.05]  46.91,50.55 0 top
TP18  [PAD.03X.05]  21.51,58.17 0 top
TP19  TEST-POINT3X5  [PAD.03X.05]  55.8,73.67 180 top
TP20  [PAD.03X.05]  26.59,90.43 0 top
TP21  [PAD.03X.05]  50.72,95.51 0 top
TP22  [PAD.03X.05]  22.78,82.81 0 top
TP23  [PAD.03X.05]  24.05,90.43 0 top
TP24  [PAD.03X.05]  42.08,87.89 0 top
TP25  [PAD.03X.05]  44.37,89.16 0 top
TP26  [PAD.03X.05]  46.91,82.81 0 top
TP27  [PAD.03X.05]  21.51,90.43 0 top
TP28  TEST-POINT3X5  [PAD.03X.05]  55.8,105.93 180 top
TP29  [PAD.03X.05]  26.59,122.69 0 top
TP30  [PAD.03X.05]  50.72,127.77 0 top
TP31  [PAD.03X.05]  22.78,115.07 0 top
TP32  [PAD.03X.05]  24.05,122.69 0 top
TP33  [PAD.03X.05]  42.08,120.15 0 top
TP34  [PAD.03X.05]  44.37,121.42 0 top
TP35  [PAD.03X.05]  46.91,115.07 0 top
TP36  [PAD.03X.05]  21.51,122.69 0 top
TP37  TEST-POINT3X5  [PAD.03X.05]  55.8,138.19 180 top
TP38  [PAD.03X.05]  26.59,154.95 0 top
TP39  [PAD.03X.05]  50.72,160.03 0 top
TP40  [PAD.03X.05]  22.78,147.33 0 top
TP41  [PAD.03X.05]  24.05,154.95 0 top
TP42  [PAD.03X.05]  42.08,152.41 0 top
TP43  [PAD.03X.05]  44.37,153.68 0 top
TP44  [PAD.03X.05]  46.91,147.33 0 top
TP45  [PAD.03X.05]  21.51,154.95 0 top
U1  DAPLINK_KL26Z  [QFN-32-NOPAD]  38.02,19.56 270 top
U2  16MHz  [CRYSTAL-SMD-2X2.5MM]  44.37,18.29 90 top
U3  ARTEMIS_MODULESMD  [ARTEMIS_FP]  85.01,18.29 0 top
U4  1.8V  [SOT23-5]  53.26,11.94 180 top
U5  LIS2DH12  [LGA-12-LISDH12]  62.15,20.83 0 top
U6  DAPLINK_KL26Z  [QFN-32-NOPAD]  38.02,51.82 270 top
U7  16MHz  [CRYSTAL-SMD-2X2.5MM]  44.37,50.55 90 top
U8  ARTEMIS_MODULESMD  [ARTEMIS_FP]  85.01,50.55 0 top
U9  1.8V  [SOT23-5]  53.26,44.2 180 top
U10  LIS2DH12  [LGA-12-LISDH12]  62.15,53.09 0 top
U11  DAPLINK_KL26Z  [QFN-32-NOPAD]  38.02,84.08 270 top
U12  16MHz  [CRYSTAL-SMD-2X2.5MM]  44.37,82.81 90 top
U13  ARTEMIS_MODULESMD  [ARTEMIS_FP]  85.01,82.81 0 top
U14  1.8V  [SOT23-5]  53.26,76.46 180 top
U15  LIS2DH12  [LGA-12-LISDH12]  62.15,85.35 0 top
U16  DAPLINK_KL26Z  [QFN-32-NOPAD]  38.02,116.34 270 top
U17  16MHz  [CRYSTAL-SMD-2X2.5MM]  44.37,115.07 90 top
U18  ARTEMIS_MODULESMD  [ARTEMIS_FP]  85.01,115.07 0 top
U19  1.8V  [SOT23-5]  53.26,108.72 180 top
U20  LIS2DH12  [LGA-12-LISDH12]  62.15,117.61 0 top
U21  DAPLINK_KL26Z  [QFN-32-NOPAD]  38.02,148.6 270 top
U22  16MHz  [CRYSTAL-SMD-2X2.5MM]  44.37,147.33 90 top
U23  ARTEMIS_MODULESMD  [ARTEMIS_FP]  85.01,147.33 0 top
U24  1.8V  [SOT23-5]  53.26,140.98 180 top
U25  LIS2DH12  [LGA-12-LISDH12]  62.15,149.87 0 top
U$1  [10]  59.61,29.72 90 top
U$2  [21]  60.88,29.72 90 top
U$3  [32]  62.15,29.72 90 top
U$4  [43]  63.42,29.72 90 top
U$5  [54]  64.69,29.59 90 top
U$6  [65]  65.96,29.72 90 top
U$7  [76]  67.23,29.72 90 top
U$8  [87]  68.5,29.47 90 top
U$9  [98]  69.77,29.72 90 top
U$10  [109]  71.04,29.34 90 top
U$11  [1110]  72.31,29.21 90 top
U$12  [1211]  73.58,29.34 90 top
U$13  [1312]  74.85,29.34 90 top
U$14  [GND13]  76.75,35.44 0 top
U$15  [10]  59.61,61.98 90 top
U$16  [SFE_LOGO_FLAME_.2]  36.75,35.44 0 top
U$17  [ARTMBED17]  13.25,29.72 0 top
U$18  [QWIIC_4MM]  62.15,7.88 0 bottom
U$19  [COM7]  35.23,21.97 90 top
U$20  [HID5]  36.75,22.35 90 top
U$21  [MSD6]  38.27,22.1 90 top
U$22  [MIC0]  66.21,24.26 90 top
U$23  [HW3]  79.55,8.64 90 top
U$24  [SW4]  78.02,8.77 90 top
U$25  [_RESET_TGT2]  82.22,11.81 0 top
U$26  [RESET_IF1]  41.19,33.4 0 top
U$27  [3V39]  58.34,28.45 90 top
U$28  [VDD8]  57.2,28.32 90 top
U$29  [21]  60.88,61.98 90 top
U$30  [32]  62.15,61.98 90 top
U$31  [43]  63.42,61.98 90 top
U$32  [54]  64.69,61.85 90 top
U$33  [65]  65.96,61.98 90 top
U$34  [76]  67.23,61.98 90 top
U$35  [87]  68.5,61.73 90 top
U$36  [98]  69.77,61.98 90 top
U$37  [109]  71.04,61.6 90 top
U$38  [1110]  72.31,61.47 90 top
U$39  [1211]  73.58,61.6 90 top
U$40  [1312]  74.85,61.6 90 top
U$41  [GND13]  76.75,67.7 0 top
U$42  [SFE_LOGO_FLAME_.2]  36.75,67.7 0 top
U$43  [ARTMBED17]  13.25,61.98 0 top
U$44  [QWIIC_4MM]  62.15,40.14 0 bottom
U$45  [COM7]  35.23,54.23 90 top
U$46  [HID5]  36.75,54.61 90 top
U$47  [MSD6]  38.27,54.36 90 top
U$48  [MIC0]  66.21,56.52 90 top
U$49  [HW3]  79.55,40.9 90 top
U$50  [SW4]  78.02,41.03 90 top
U$51  [_RESET_TGT2]  82.22,44.07 0 top
U$52  [RESET_IF1]  41.19,65.66 0 top
U$53  [3V39]  58.34,60.71 90 top
U$54  [VDD8]  57.2,60.58 90 top
U$55  [10]  59.61,94.24 90 top
U$56  [21]  60.88,94.24 90 top
U$57  [32]  62.15,94.24 90 top
U$58  [43]  63.42,94.24 90 top
U$59  [54]  64.69,94.11 90 top
U$60  [65]  65.96,94.24 90 top
U$61  [76]  67.23,94.24 90 top
U$62  [87]  68.5,93.99 90 top
U$63  [98]  69.77,94.24 90 top
U$64  [109]  71.04,93.86 90 top
U$65  [1110]  72.31,93.73 90 top
U$66  [1211]  73.58,93.86 90 top
U$67  [1312]  74.85,93.86 90 top
U$68  [GND13]  76.75,99.95 0 top
U$69  [SFE_LOGO_FLAME_.2]  36.75,99.95 0 top
U$70  [ARTMBED17]  13.25,94.24 0 top
U$71  [QWIIC_4MM]  62.15,72.4 0 bottom
U$72  [COM7]  35.23,86.49 90 top
U$73  [HID5]  36.75,86.87 90 top
U$74  [MSD6]  38.27,86.62 90 top
U$75  [MIC0]  66.21,88.78 90 top
U$76  [HW3]  79.55,73.16 90 top
U$77  [SW4]  78.02,73.28 90 top
U$78  [_RESET_TGT2]  82.22,76.33 0 top
U$79  [RESET_IF1]  41.19,97.92 0 top
U$80  [3V39]  58.34,92.97 90 top
U$81  [VDD8]  57.2,92.84 90 top
U$82  [10]  59.61,126.5 90 top
U$83  [21]  60.88,126.5 90 top
U$84  [32]  62.15,126.5 90 top
U$85  [43]  63.42,126.5 90 top
U$86  [54]  64.69,126.37 90 top
U$87  [65]  65.96,126.5 90 top
U$88  [76]  67.23,126.5 90 top
U$89  [87]  68.5,126.25 90 top
U$90  [98]  69.77,126.5 90 top
U$91  [109]  71.04,126.12 90 top
U$92  [1110]  72.31,125.99 90 top
U$93  [1211]  73.58,126.12 90 top
U$94  [1312]  74.85,126.12 90 top
U$95  [GND13]  76.75,132.22 0 top
U$96  [SFE_LOGO_FLAME_.2]  36.75,132.22 0 top
U$97  [ARTMBED17]  13.25,126.5 0 top
U$98  [QWIIC_4MM]  62.15,104.66 0 bottom
U$99  [COM7]  35.23,118.75 90 top
U$100  [HID5]  36.75,119.13 90 top
U$101  [MSD6]  38.27,118.88 90 top
U$102  [MIC0]  66.21,121.04 90 top
U$103  [HW3]  79.55,105.42 90 top
U$104  [SW4]  78.02,105.55 90 top
U$105  [_RESET_TGT2]  82.22,108.59 0 top
U$106  [RESET_IF1]  41.19,130.18 0 top
U$107  [3V39]  58.34,125.23 90 top
U$108  [VDD8]  57.2,125.1 90 top
U$109  [10]  59.61,158.76 90 top
U$110  [21]  60.88,158.76 90 top
U$111  [32]  62.15,158.76 90 top
U$112  [43]  63.42,158.76 90 top
U$113  [54]  64.69,158.63 90 top
U$114  [65]  65.96,158.76 90 top
U$115  [76]  67.23,158.76 90 top
U$116  [87]  68.5,158.51 90 top
U$117  [98]  69.77,158.76 90 top
U$118  [109]  71.04,158.38 90 top
U$119  [1110]  72.31,158.25 90 top
U$120  [1211]  73.58,158.38 90 top
U$121  [1312]  74.85,158.38 90 top
U$122  [GND13]  76.75,164.48 0 top
U$123  [SFE_LOGO_FLAME_.2]  36.75,164.48 0 top
U$124  [ARTMBED17]  13.25,158.76 0 top
U$125  [QWIIC_4MM]  62.15,136.92 0 bottom
U$126  [COM7]  35.23,151.01 90 top
U$127  [HID5]  36.75,151.39 90 top
U$128  [MSD6]  38.27,151.14 90 top
U$129  [MIC0]  66.21,153.3 90 top
U$130  [HW3]  79.55,137.68 90 top
U$131  [SW4]  78.02,137.81 90 top
U$132  [_RESET_TGT2]  82.22,140.85 0 top
U$133  [RESET_IF1]  41.19,162.44 0 top
U$134  [3V39]  58.34,157.49 90 top
U$135  [VDD8]  57.2,157.36 90 top
Y1  32.768kHz  [CRYSTAL-SMD-3.2X1.5MM]  74.85,15.75 270 top
Y2  32.768kHz  [CRYSTAL-SMD-3.2X1.5MM]  74.85,48.01 270 top
Y3  32.768kHz  [CRYSTAL-SMD-3.2X1.5MM]  74.85,80.27 270 top
Y4  32.768kHz  [CRYSTAL-SMD-3.2X1.5MM]  74.85,112.53 270 top
Y5  32.768kHz  [CRYSTAL-SMD-3.2X1.5MM]  74.85,144.79 270 top

## Library data of the parts
C1 C4 C7 C8 C11 C13 C17 C20 C23 C25 C29 C35 C38 C39 C41 C43 C45 C49 C55 C58 C59 C61 C63 C65 C69 C75 C78 C79 C81 C83 C85 C89 C95 C98 C99 = SparkFun-Capacitors; PROD_ID: CAP-08604
C2 C18 C30 C32 C50 C52 C70 C72 C90 C92 = SparkFun-Capacitors; PROD_ID: CAP-11015
C3 C12 C16 C19 C21 C24 C28 C31 C33 C34 C44 C48 C51 C53 C54 C64 C68 C71 C73 C74 C84 C88 C91 C93 C94 = SparkFun-Capacitors; PROD_ID: CAP-00868
C5 C36 C56 C76 C96 = SparkFun-Capacitors; PROD_ID: CAP-07886
C6 C37 C57 C77 C97 = SparkFun-Capacitors; PROD_ID: CAP-07888
C9 C10 C22 C40 C42 C60 C62 C80 C82 C100 = SparkFun-Capacitors; PROD_ID: CAP-09137
C14 C15 C26 C27 C46 C47 C66 C67 C86 C87 = SparkFun-Capacitors; PROD_ID: CAP-07881
D1 D2 D8 D9 D15 D16 D22 D23 D29 D30 = SparkFun-DiscreteSemi; PROD_ID: DIO-14072
D3 D10 D17 D24 D31 = SparkFun-IC-Power; PROD_ID: DIO-14084
D4 D11 D18 D25 D32 = SparkFun-LED; PROD_ID: DIO-08575
D5 D12 D19 D26 D33 = SparkFun-LED; PROD_ID: DIO-00821
D6 D13 D20 D27 D34 = SparkFun-LED; PROD_ID: DIO-09003
D7 D14 D21 D28 D35 = SparkFun-LED; PROD_ID: DIO-00819
E1-E5 = SparkFun-Sensors; PROD_ID: IC-14361
E$1-E$4 FD1-FD20 LOGO1-LOGO10 U$16 U$18 U$42 U$44 U$69 U$71 U$96 U$98 U$123 U$125 = SparkFun-Aesthetics
E$5 E$6 = SparkFun-Retired
ECC1-ECC5 = ATECC508A
J1 J10 J19 J28 J37 = SparkFun-Connectors; PROD_ID: CONN-11443
J2 J11 J20 J29 J38 = SparkFun-Connectors; PROD_ID: CONN-14122
J3 J4 J6 J9 J12 J13 J15 J18 J21 J22 J24 J27 J30 J31 J33 J36 J39 J40 J42 J45 TP1-TP45 = SparkFun-Connectors
J5 J14 J23 J32 J41 = SparkFun-Connectors; PROD_ID: CONN-08438
J7 J16 J25 J34 J43 = SparkFun-Connectors; DIGIKEY: 609-4320-2-ND; PROD_ID: CONN-14233
J8 J17 J26 J35 J44 = SparkFun-Connectors; PROD_ID: CONN-13694
JP1-JP5 = SparkFun-Jumpers
R1-R3 R19 R22 R30 R31 R44 R45 R48 R56 R57 R67 R77 R78 R81 R89 R90 R100 R110 R111 R114 R122 R123 R133 R143 R144 R147 R155 R156 = SparkFun-Resistors; PROD_ID: RES-00824
R4-R6 R9 R12 R13 R37 R38 R58-R60 R63 R70 R71 R91-R93 R96 R103 R104 R124-R126 R129 R136 R137 R157-R159 R162 = SparkFun-Resistors; PROD_ID: RES-08609
R7 R8 R61 R62 R94 R95 R127 R128 R160 R161 = SparkFun-Resistors; PROD_ID: RES-12083
R10 R11 R15-R18 R32-R36 R40-R43 R64-R66 R68 R69 R73-R76 R97-R99 R101 R102 R106-R109 R130-R132 R134 R135 R139-R142 R163-R165 = SparkFun-Resistors
R14 R39 R72 R105 R138 = SparkFun-Resistors; PROD_ID: RES-09823
R20 R21 R46 R47 R79 R80 R112 R113 R145 R146 = SparkFun-Resistors; PROD_ID: RES-08272
R23 R29 R49 R55 R82 R88 R115 R121 R148 R154 = SparkFun-Resistors; PROD_ID: RES-08270
R24 R50 R83 R116 R149 = SparkFun-Resistors; PROD_ID: RES-12581
R25-R28 R51-R54 R84-R87 R117-R120 R150-R153 = SparkFun-Resistors; PROD_ID: RES-00818
S1-S10 = SparkFun-Switches; PROD_ID: SWCH-13065
U1 U6 U11 U16 U21 = artembed
U2 U7 U12 U17 U22 = SparkFun-Clocks; PROD_ID: XTAL-14664
U3 U8 U13 U18 U23 = SparkFun-IC-Microcontroller; PROD_ID: SUB-14402
U4 U9 U14 U19 U24 = SparkFun-IC-Power; PROD_ID: VREG-14239
U5 U10 U15 U20 U25 = SparkFun-Sensors; DIGIKEY: 497-14851-2-ND; PROD_ID: IC-14229
U$1-U$15 U$17 U$29-U$41 U$43 U$55-U$68 U$70 U$82-U$95 U$97 U$109-U$122 U$124 = temp_buzzard_labels
U$19-U$28 U$45-U$54 U$72-U$81 U$99-U$108 U$126-U$135 = buzzard_labels_1
Y1-Y5 = SparkFun-Clocks; PROD_ID: XTAL-13062

## Nets
1.8V: C16.1 J7.10 TP1.P$1 U4.5
1.8V1: C28.1 J16.10 TP2.P$1 U9.5
1.8V2: C48.1 J25.10 TP19.P$1 U14.5
1.8V3: C68.1 J34.10 TP28.P$1 U19.5
1.8V4: C88.1 J43.10 TP37.P$1 U24.5
3.3V: C6.1 C7.1 C8.1 D1.A J4.1 R1.2 R2.2 R10.2 R11.2 R15.2 R16.2 R17.2 R18.2 R25.2 R26.2 R27.2 R28.2 TP13.P$1 U1.5 U1.7 U1.15
3.3V1: C37.1 C38.1 C39.1 D8.A J13.1 R31.2 R35.2 R36.2 R40.2 R41.2 R42.2 R43.2 R45.2 R51.2 R52.2 R53.2 R54.2 TP14.P$1 U6.5 U6.7 U6.15
3.3V2: C57.1 C58.1 C59.1 D15.A J22.1 R67.2 R68.2 R69.2 R73.2 R74.2 R75.2 R76.2 R78.2 R84.2 R85.2 R86.2 R87.2 TP23.P$1 U11.5 U11.7 U11.15
3.3V3: C77.1 C78.1 C79.1 D22.A J31.1 R100.2 R101.2 R102.2 R106.2 R107.2 R108.2 R109.2 R111.2 R117.2 R118.2 R119.2 R120.2 TP32.P$1 U16.5 U16.7 U16.15
3.3V4: C97.1 C98.1 C99.1 D29.A J40.1 R133.2 R134.2 R135.2 R139.2 R140.2 R141.2 R142.2 R144.2 R150.2 R151.2 R152.2 R153.2 TP41.P$1 U21.5 U21.7 U21.15
!RST: C11.1 J4.10 R14.1 R19.2 U1.19 U1.32
!RST1: C23.1 J13.10 R39.1 R44.2 U6.19 U6.32
!RST2: C43.1 J22.10 R72.1 R77.2 U11.19 U11.32
!RST3: C63.1 J31.10 R105.1 R110.2 U16.19 U16.32
!RST4: C83.1 J40.10 R138.1 R143.2 U21.19 U21.32
!TGT_RST: C1.1 JP1.2 R1.1 R9.2 S3.3 S3.4 TP11.P$1 U1.21
!TGT_RST1: C20.1 JP2.2 R31.1 R63.2 S4.3 S4.4 TP7.P$1 U6.21
!TGT_RST2: C41.1 JP3.2 R67.1 R96.2 S6.3 S6.4 TP21.P$1 U11.21
!TGT_RST3: C61.1 JP4.2 R100.1 R129.2 S8.3 S8.4 TP30.P$1 U16.21
!TGT_RST4: C81.1 JP5.2 R133.1 R162.2 S10.3 S10.4 TP39.P$1 U21.21
!TGT_RST!_HW: C5.1 J3.10 JP1.3 R3.1 S2.3 S2.4 U3.~RST
!TGT_RST!_HW1: C36.1 J12.10 JP2.3 R56.1 S1.3 S1.4 U8.~RST
!TGT_RST!_HW2: C56.1 J21.10 JP3.3 R89.1 S5.3 S5.4 U13.~RST
!TGT_RST!_HW3: C76.1 J30.10 JP4.3 R122.1 S7.3 S7.4 U18.~RST
!TGT_RST!_HW4: C96.1 J39.10 JP5.3 R155.1 S9.3 S9.4 U23.~RST
!TGT_RST!_SW: JP1.1 U3.~D19
!TGT_RST!_SW1: JP2.1 U8.~D19
!TGT_RST!_SW2: JP3.1 U13.~D19
!TGT_RST!_SW3: JP4.1 U18.~D19
!TGT_RST!_SW4: JP5.1 U23.~D19
CAMERA_D0: J7.14 U3.~D43
CAMERA_D1: J7.3 U3.AD34
CAMERA_D2: J7.9 U3.~AD31
CAMERA_D3: J7.5 U3.~AD33/SWO
CAMERA_D4: J7.12 U3.D41
CAMERA_D5: J7.20 U3.~D44
CAMERA_D6: J7.19 U3.~D37
CAMERA_D7: J7.13 U3.~D45
CAMERA_D8: J16.3 U8.AD34
CAMERA_D9: J16.5 U8.~AD33/SWO
CAMERA_D10: J16.12 U8.D41
CAMERA_D11: J16.20 U8.~D44
CAMERA_D12: J16.19 U8.~D37
CAMERA_D13: J16.13 U8.~D45
CAMERA_D14: J16.14 U8.~D43
CAMERA_D15: J16.9 U8.~AD31
CAMERA_D16: J25.3 U13.AD34
CAMERA_D17: J25.5 U13.~AD33/SWO
CAMERA_D18: J25.12 U13.D41
CAMERA_D19: J25.20 U13.~D44
CAMERA_D20: J25.19 U13.~D37
CAMERA_D21: J25.13 U13.~D45
CAMERA_D22: J25.14 U13.~D43
CAMERA_D23: J25.9 U13.~AD31
CAMERA_D24: J34.3 U18.AD34
CAMERA_D25: J34.5 U18.~AD33/SWO
CAMERA_D26: J34.12 U18.D41
CAMERA_D27: J34.20 U18.~D44
CAMERA_D28: J34.19 U18.~D37
CAMERA_D29: J34.13 U18.~D45
CAMERA_D30: J34.14 U18.~D43
CAMERA_D31: J34.9 U18.~AD31
CAMERA_D32: J43.3 U23.AD34
CAMERA_D33: J43.5 U23.~AD33/SWO
CAMERA_D34: J43.12 U23.D41
CAMERA_D35: J43.20 U23.~D44
CAMERA_D36: J43.19 U23.~D37
CAMERA_D37: J43.13 U23.~D45
CAMERA_D38: J43.14 U23.~D43
CAMERA_D39: J43.9 U23.~AD31
CAMERA_DVDD_EN: R30.2 U3.D15 U4.3
CAMERA_DVDD_EN1: R57.2 U8.D15 U9.3
CAMERA_DVDD_EN2: R90.2 U13.D15 U14.3
CAMERA_DVDD_EN3: R123.2 U18.D15 U19.3
CAMERA_DVDD_EN4: R156.2 U23.D15 U24.3
CAMERA_HSYNC: J7.16 U3.~D42
CAMERA_HSYNC1: J16.16 U8.~D42
CAMERA_HSYNC2: J25.16 U13.~D42
CAMERA_HSYNC3: J34.16 U18.~D42
CAMERA_HSYNC4: J43.16 U23.~D42
CAMERA_INT: J7.18 U3.D38
CAMERA_INT1: J16.18 U8.D38
CAMERA_INT2: J25.18 U13.D38
CAMERA_INT3: J34.18 U18.D38
CAMERA_INT4: J43.18 U23.D38
CAMERA_MCLK: J7.8 U3.~D18
CAMERA_MCLK1: J16.8 U8.~D18
CAMERA_MCLK2: J25.8 U13.~D18
CAMERA_MCLK3: J34.8 U18.~D18
CAMERA_MCLK4: J43.8 U23.~D18
CAMERA_PCLK: J7.17 U3.D36
CAMERA_PCLK1: J16.17 U8.D36
CAMERA_PCLK2: J25.17 U13.D36
CAMERA_PCLK3: J34.17 U18.D36
CAMERA_PCLK4: J43.17 U23.D36
CAMERA_TRIG: J7.7 U3.D17
CAMERA_TRIG1: J16.7 U8.D17
CAMERA_TRIG2: J25.7 U13.D17
CAMERA_TRIG3: J34.7 U18.D17
CAMERA_TRIG4: J43.7 U23.D17
CAMERA_VSYNC: J7.6 U3.AD16
CAMERA_VSYNC1: J16.6 U8.AD16
CAMERA_VSYNC2: J25.6 U13.AD16
CAMERA_VSYNC3: J34.6 U18.AD16
CAMERA_VSYNC4: J43.6 U23.AD16
D1: J9.1 U3.~AD29
D2: J5.2 U3.~AD13
D3: J9.2 U3.~D25
D4: J5.3 U3.~D6
D5: J9.3 U3.~D27
D6: J5.4 U3.~D4
D7: J9.4 U3.~AD35
D8: J5.5 U3.D7
D9: J9.5 U3.~D5
D10: J5.6 U3.D2
D11: J9.6 U3.D1
D12: J5.7 U3.D0
D13: J9.7 U3.D3
D14: J18.7 U8.D3
D15: J18.1 U8.~AD29
D16: J14.2 U8.~AD13
D17: J18.2 U8.~D25
D18: J14.3 U8.~D6
D19: J18.3 U8.~D27
D20: J14.4 U8.~D4
D21: J18.4 U8.~AD35
D22: J14.5 U8.D7
D23: J18.5 U8.~D5
D24: J14.6 U8.D2
D25: J18.6 U8.D1
D26: J14.7 U8.D0
D27: J27.7 U13.D3
D28: J27.1 U13.~AD29
D29: J23.2 U13.~AD13
D30: J27.2 U13.~D25
D31: J23.3 U13.~D6
D32: J27.3 U13.~D27
D33: J23.4 U13.~D4
D34: J27.4 U13.~AD35
D35: J23.5 U13.D7
D36: J27.5 U13.~D5
D37: J23.6 U13.D2
D38: J27.6 U13.D1
D39: J23.7 U13.D0
D40: J36.7 U18.D3
D41: J36.1 U18.~AD29
D42: J32.2 U18.~AD13
D43: J36.2 U18.~D25
D44: J32.3 U18.~D6
D45: J36.3 U18.~D27
D46: J32.4 U18.~D4
D47: J36.4 U18.~AD35
D48: J32.5 U18.D7
D49: J36.5 U18.~D5
D50: J32.6 U18.D2
D51: J36.6 U18.D1
D52: J32.7 U18.D0
D53: J45.7 U23.D3
D54: J45.1 U23.~AD29
D55: J41.2 U23.~AD13
D56: J45.2 U23.~D25
D57: J41.3 U23.~D6
D58: J45.3 U23.~D27
D59: J41.4 U23.~D4
D60: J45.4 U23.~AD35
D61: J41.5 U23.D7
D62: J45.5 U23.~D5
D63: J41.6 U23.D2
D64: J45.6 U23.D1
D65: J41.7 U23.D0
GND: C1.2 C2.2 C3.2 C4.2 C5.2 C6.2 C7.2 C8.2 C9.2 C10.2 C11.2 C12.2 C13.2 C14.1 C15.1 C16.2 C17.2 C18.2 C19.2 C21.2 D3.2 D7.C E2.2 E2.3 E2.6 E2.7 E2.8 ECC1.4 ECC1.P J1.2 J2.GND J2.GND2 J3.3 J3.5 J3.9 J4.3 J4.5 J4.9 J5.8 J6.1 J6.2 J6.3 J6.4 J6.5 J6.6 J6.7 J7.2 J7.15 J8.1 R7.1 R8.1 R19.1 R22.1 R30.1 S2.1 S2.2 S3.1 S3.2 TP9.P$1 U1.2 U1.8 U1.16 U2.P2 U2.P4 U3.GND@1 U3.GND@22 U3.GND@38 U3.GND@39 U3.GND@47 U3.GND@59 U4.2 U5.5 U5.6 U5.7 U5.8
GND1: C20.2 C22.2 C23.2 C24.2 C25.2 C26.1 C27.1 C28.2 C29.2 C30.2 C31.2 C32.2 C33.2 C34.2 C35.2 C36.2 C37.2 C38.2 C39.2 C40.2 D10.2 D14.C E1.2 E1.3 E1.6 E1.7 E1.8 ECC2.4 ECC2.P J10.2 J11.GND J11.GND2 J12.3 J12.5 J12.9 J13.3 J13.5 J13.9 J14.8 J15.1 J15.2 J15.3 J15.4 J15.5 J15.6 J15.7 J16.2 J16.15 J17.1 R44.1 R48.1 R57.1 R61.1 R62.1 S1.1 S1.2 S4.1 S4.2 TP18.P$1 U6.2 U6.8 U6.16 U7.P2 U7.P4 U8.GND@1 U8.GND@22 U8.GND@38 U8.GND@39 U8.GND@47 U8.GND@59 U9.2 U10.5 U10.6 U10.7 U10.8
GND2: C41.2 C42.2 C43.2 C44.2 C45.2 C46.1 C47.1 C48.2 C49.2 C50.2 C51.2 C52.2 C53.2 C54.2 C55.2 C56.2 C57.2 C58.2 C59.2 C60.2 D17.2 D21.C E3.2 E3.3 E3.6 E3.7 E3.8 ECC3.4 ECC3.P J19.2 J20.GND J20.GND2 J21.3 J21.5 J21.9 J22.3 J22.5 J22.9 J23.8 J24.1 J24.2 J24.3 J24.4 J24.5 J24.6 J24.7 J25.2 J25.15 J26.1 R77.1 R81.1 R90.1 R94.1 R95.1 S5.1 S5.2 S6.1 S6.2 TP27.P$1 U11.2 U11.8 U11.16 U12.P2 U12.P4 U13.GND@1 U13.GND@22 U13.GND@38 U13.GND@39 U13.GND@47 U13.GND@59 U14.2 U15.5 U15.6 U15.7 U15.8
GND3: C61.2 C62.2 C63.2 C64.2 C65.2 C66.1 C67.1 C68.2 C69.2 C70.2 C71.2 C72.2 C73.2 C74.2 C75.2 C76.2 C77.2 C78.2 C79.2 C80.2 D24.2 D28.C E4.2 E4.3 E4.6 E4.7 E4.8 ECC4.4 ECC4.P J28.2 J29.GND J29.GND2 J30.3 J30.5 J30.9 J31.3 J31.5 J31.9 J32.8 J33.1 J33.2 J33.3 J33.4 J33.5 J33.6 J33.7 J34.2 J34.15 J35.1 R110.1 R114.1 R123.1 R127.1 R128.1 S7.1 S7.2 S8.1 S8.2 TP36.P$1 U16.2 U16.8 U16.16 U17.P2 U17.P4 U18.GND@1 U18.GND@22 U18.GND@38 U18.GND@39 U18.GND@47 U18.GND@59 U19.2 U20.5 U20.6 U20.7 U20.8
GND4: C81.2 C82.2 C83.2 C84.2 C85.2 C86.1 C87.1 C88.2 C89.2 C90.2 C91.2 C92.2 C93.2 C94.2 C95.2 C96.2 C97.2 C98.2 C99.2 C100.2 D31.2 D35.C E5.2 E5.3 E5.6 E5.7 E5.8 ECC5.4 ECC5.P J37.2 J38.GND J38.GND2 J39.3 J39.5 J39.9 J40.3 J40.5 J40.9 J41.8 J42.1 J42.2 J42.3 J42.4 J42.5 J42.6 J42.7 J43.2 J43.15 J44.1 R143.1 R147.1 R156.1 R160.1 R161.1 S9.1 S9.2 S10.1 S10.2 TP45.P$1 U21.2 U21.8 U21.16 U22.P2 U22.P4 U23.GND@1 U23.GND@22 U23.GND@38 U23.GND@39 U23.GND@47 U23.GND@59 U24.2 U25.5 U25.6 U25.7 U25.8
LED_HID: D5.C U1.30
LED_HID1: D12.C U6.30
LED_HID2: D19.C U11.30
LED_HID3: D26.C U16.30
LED_HID4: D33.C U21.30
LED_MSD: D4.C U1.29
LED_MSD1: D11.C U6.29
LED_MSD2: D18.C U11.29
LED_MSD3: D25.C U16.29
LED_MSD4: D32.C U21.29
LED_UART: D6.C U1.31
LED_UART1: D13.C U6.31
LED_UART2: D20.C U11.31
LED_UART3: D27.C U16.31
LED_UART4: D34.C U21.31
N$1: D4.A R25.1
N$2: D5.A R26.1
N$3: D6.A R27.1
N$4: J2.B5 R7.2
N$5: J2.A5 R8.2
N$6: D11.A R51.1
N$7: D7.A R28.1
N$8: D3.4 R23.1
N$9: D3.6 R29.1
N$10: R2.1 U1.14
N$11: R11.1 U1.20
N$12: D12.A R52.1
N$13: C9.1 U1.17 U2.P1
N$14: C14.2 U3.XI Y1.P$2
N$15: C15.2 U3.XO Y1.P$1
N$16: C10.1 TP5.P$1 U1.18 U2.P3
N$17: R12.1 TP3.P$1 U1.24
N$18: R13.1 TP4.P$1 U1.25
N$19: R10.1 U1.23
N$20: R22.2 U3.BOOT
N$21: D2.A J1.1 TP12.P$1
N$22: R9.1 U1.22
N$23: R4.1 U1.26
N$24: R5.1 U1.27
N$25: R6.1 U1.28
N$26: D13.A R53.1
N$27: J11.B5 R61.2
N$28: J11.A5 R62.2
N$29: D10.4 R49.1
N$30: D10.6 R55.1
N$31: D14.A R54.1
N$32: R45.1 U6.14
N$33: C40.1 U6.17 U7.P1
N$34: C22.1 TP17.P$1 U6.18 U7.P3
N$35: R36.1 U6.20
N$36: R35.1 U6.23
N$37: D9.A J10.1 TP8.P$1
N$38: R63.1 U6.22
N$39: R58.1 U6.26
N$40: R59.1 U6.27
N$41: R60.1 U6.28
N$42: C26.2 U8.XI Y2.P$2
N$43: C27.2 U8.XO Y2.P$1
N$44: R37.1 TP15.P$1 U6.24
N$45: R38.1 TP16.P$1 U6.25
N$46: R48.2 U8.BOOT
N$47: D18.A R84.1
N$48: D19.A R85.1
N$49: D20.A R86.1
N$50: J20.B5 R94.2
N$51: J20.A5 R95.2
N$52: D17.4 R82.1
N$53: D17.6 R88.1
N$54: D21.A R87.1
N$55: R78.1 U11.14
N$56: C60.1 U11.17 U12.P1
N$57: C42.1 TP26.P$1 U11.18 U12.P3
N$58: R69.1 U11.20
N$59: R68.1 U11.23
N$60: D16.A J19.1 TP22.P$1
N$61: R96.1 U11.22
N$62: R91.1 U11.26
N$63: R92.1 U11.27
N$64: R93.1 U11.28
N$65: C46.2 U13.XI Y3.P$2
N$66: C47.2 U13.XO Y3.P$1
N$67: R70.1 TP24.P$1 U11.24
N$68: R71.1 TP25.P$1 U11.25
N$69: R81.2 U13.BOOT
N$70: D25.A R117.1
N$71: D26.A R118.1
N$72: D27.A R119.1
N$73: J29.B5 R127.2
N$74: J29.A5 R128.2
N$75: D24.4 R115.1
N$76: D24.6 R121.1
N$77: D28.A R120.1
N$78: R111.1 U16.14
N$79: C80.1 U16.17 U17.P1
N$80: C62.1 TP35.P$1 U16.18 U17.P3
N$81: R102.1 U16.20
N$82: R101.1 U16.23
N$83: D23.A J28.1 TP31.P$1
N$84: R129.1 U16.22
N$85: R124.1 U16.26
N$86: R125.1 U16.27
N$87: R126.1 U16.28
N$88: C66.2 U18.XI Y4.P$2
N$89: C67.2 U18.XO Y4.P$1
N$90: R103.1 TP33.P$1 U16.24
N$91: R104.1 TP34.P$1 U16.25
N$92: R114.2 U18.BOOT
N$93: D32.A R150.1
N$94: D33.A R151.1
N$95: D34.A R152.1
N$96: J38.B5 R160.2
N$97: J38.A5 R161.2
N$98: D31.4 R148.1
N$99: D31.6 R154.1
N$100: D35.A R153.1
N$101: R144.1 U21.14
N$102: C100.1 U21.17 U22.P1
N$103: C82.1 TP44.P$1 U21.18 U22.P3
N$104: R135.1 U21.20
N$105: R134.1 U21.23
N$106: D30.A J37.1 TP40.P$1
N$107: R162.1 U21.22
N$108: R157.1 U21.26
N$109: R158.1 U21.27
N$110: R159.1 U21.28
N$111: C86.2 U23.XI Y5.P$2
N$112: C87.2 U23.XO Y5.P$1
N$113: R136.1 TP42.P$1 U21.24
N$114: R137.1 TP43.P$1 U21.25
N$115: R147.2 U23.BOOT
PDM_CLK: E2.4 U3.~AD12
PDM_CLK1: E1.4 U8.~AD12
PDM_CLK2: E3.4 U13.~AD12
PDM_CLK3: E4.4 U18.~AD12
PDM_CLK4: E5.4 U23.~AD12
PDM_DATA: E2.1 U3.~AD11
PDM_DATA1: E1.1 U8.~AD11
PDM_DATA2: E3.1 U13.~AD11
PDM_DATA3: E4.1 U18.~AD11
PDM_DATA4: E5.1 U23.~AD11
SCL: ECC1.6 J7.21 J8.4 R20.1 U3.D8 U5.1
SCL1: ECC2.6 J16.21 J17.4 R46.1 U8.D8 U10.1
SCL2: ECC3.6 J25.21 J26.4 R79.1 U13.D8 U15.1
SCL3: ECC4.6 J34.21 J35.4 R112.1 U18.D8 U20.1
SCL4: ECC5.6 J43.21 J44.4 R145.1 U23.D8 U25.1
SDA: ECC1.5 J7.22 J8.3 R21.1 U3.D9 U5.4
SDA1: ECC2.5 J16.22 J17.3 R47.1 U8.D9 U10.4
SDA2: ECC3.5 J25.22 J26.3 R80.1 U13.D9 U15.4
SDA3: ECC4.5 J34.22 J35.3 R113.1 U18.D9 U20.4
SDA4: ECC5.5 J43.22 J44.3 R146.1 U23.D9 U25.4
TCLK: J4.4 R18.1 U1.10
TCLK1: J13.4 R43.1 U6.10
TCLK2: J22.4 R76.1 U11.10
TCLK3: J31.4 R109.1 U16.10
TCLK4: J40.4 R142.1 U21.10
TDI: J4.8 R17.1 U1.11
TDI1: J13.8 R42.1 U6.11
TDI2: J22.8 R75.1 U11.11
TDI3: J31.8 R108.1 U16.11
TDI4: J40.8 R141.1 U21.11
TDO: J4.6 R16.1 U1.12
TDO1: J13.6 R41.1 U6.12
TDO2: J22.6 R74.1 U11.12
TDO3: J31.6 R107.1 U16.12
TDO4: J40.6 R140.1 U21.12
TGT_RX: R13.2 U3.TXO-0
TGT_RX1: R38.2 U8.TXO-0
TGT_RX2: R71.2 U13.TXO-0
TGT_RX3: R104.2 U18.TXO-0
TGT_RX4: R137.2 U23.TXO-0
TGT_SWCLK: J3.4 R4.2 R33.1 U3.SWDCK
TGT_SWCLK1: J12.4 R58.2 R65.1 U8.SWDCK
TGT_SWCLK2: J21.4 R91.2 R98.1 U13.SWDCK
TGT_SWCLK3: J30.4 R124.2 R131.1 U18.SWDCK
TGT_SWCLK4: J39.4 R157.2 R164.1 U23.SWDCK
TGT_SWDIO: J3.2 R5.2 R32.1 U3.SWDIO
TGT_SWDIO1: J12.2 R59.2 R64.1 U8.SWDIO
TGT_SWDIO2: J21.2 R92.2 R97.1 U13.SWDIO
TGT_SWDIO3: J30.2 R125.2 R130.1 U18.SWDIO
TGT_SWDIO4: J39.2 R158.2 R163.1 U23.SWDIO
TGT_SWO: J3.6 R6.2 R34.1 U3.~D22
TGT_SWO1: J12.6 R60.2 R66.1 U8.~D22
TGT_SWO2: J21.6 R93.2 R99.1 U13.~D22
TGT_SWO3: J30.6 R126.2 R132.1 U18.~D22
TGT_SWO4: J39.6 R159.2 R165.1 U23.~D22
TGT_TX: R12.2 U3.RXI-0
TGT_TX1: R37.2 U8.RXI-0
TGT_TX2: R70.2 U13.RXI-0
TGT_TX3: R103.2 U18.RXI-0
TGT_TX4: R136.2 U23.RXI-0
TMS: J4.2 R15.1 U1.13
TMS1: J13.2 R40.1 U6.13
TMS2: J22.2 R73.1 U11.13
TMS3: J31.2 R106.1 U16.13
TMS4: J40.2 R139.1 U21.13
USB_D+_P: R23.2 U1.3
USB_D+_P1: R49.2 U6.3
USB_D+_P2: R82.2 U11.3
USB_D+_P3: R115.2 U16.3
USB_D+_P4: R148.2 U21.3
USB_D+_R: D3.3 J2.A6 J2.B6
USB_D+_R1: D10.3 J11.A6 J11.B6
USB_D+_R2: D17.3 J20.A6 J20.B6
USB_D+_R3: D24.3 J29.A6 J29.B6
USB_D+_R4: D31.3 J38.A6 J38.B6
USB_D-_P: R29.2 U1.4
USB_D-_P1: R55.2 U6.4
USB_D-_P2: R88.2 U11.4
USB_D-_P3: R121.2 U16.4
USB_D-_P4: R154.2 U21.4
USB_D-_R: D3.1 J2.A7 J2.B7
USB_D-_R1: D10.1 J11.A7 J11.B7
USB_D-_R2: D17.1 J20.A7 J20.B7
USB_D-_R3: D24.1 J29.A7 J29.B7
USB_D-_R4: D31.1 J38.A7 J38.B7
VBUS_IF: D3.5 J2.VBUS1 J2.VBUS2 R24.1
VBUS_IF1: D10.5 J11.VBUS1 J11.VBUS2 R50.1
VBUS_IF2: C12.1 C13.1 R14.2 R24.2 U1.6
VBUS_IF3: C24.1 C25.1 R39.2 R50.2 U6.6
VBUS_IF4: D17.5 J20.VBUS1 J20.VBUS2 R83.1
VBUS_IF5: C44.1 C45.1 R72.2 R83.2 U11.6
VBUS_IF6: D24.5 J29.VBUS1 J29.VBUS2 R116.1
VBUS_IF7: C64.1 C65.1 R105.2 R116.2 U16.6
VBUS_IF8: D31.5 J38.VBUS1 J38.VBUS2 R149.1
VBUS_IF9: C84.1 C85.1 R138.2 R149.2 U21.6
VDD: C2.1 C3.1 C4.1 C17.1 C18.1 C19.1 C21.1 D1.C D2.C E2.5 ECC1.8 J3.1 J5.1 J7.4 J7.11 J8.2 R3.2 R20.2 R21.2 R32.2 R33.2 R34.2 TP10.P$1 U3.VDD@36 U3.VDD@37 U4.1 U5.2 U5.3 U5.9 U5.10
VDD1: C29.1 C30.1 C31.1 C32.1 C33.1 C34.1 C35.1 D8.C D9.C E1.5 ECC2.8 J12.1 J14.1 J16.4 J16.11 J17.2 R46.2 R47.2 R56.2 R64.2 R65.2 R66.2 TP6.P$1 U8.VDD@36 U8.VDD@37 U9.1 U10.2 U10.3 U10.9 U10.10
VDD2: C49.1 C50.1 C51.1 C52.1 C53.1 C54.1 C55.1 D15.C D16.C E3.5 ECC3.8 J21.1 J23.1 J25.4 J25.11 J26.2 R79.2 R80.2 R89.2 R97.2 R98.2 R99.2 TP20.P$1 U13.VDD@36 U13.VDD@37 U14.1 U15.2 U15.3 U15.9 U15.10
VDD3: C69.1 C70.1 C71.1 C72.1 C73.1 C74.1 C75.1 D22.C D23.C E4.5 ECC4.8 J30.1 J32.1 J34.4 J34.11 J35.2 R112.2 R113.2 R122.2 R130.2 R131.2 R132.2 TP29.P$1 U18.VDD@36 U18.VDD@37 U19.1 U20.2 U20.3 U20.9 U20.10
VDD4: C89.1 C90.1 C91.1 C92.1 C93.1 C94.1 C95.1 D29.C D30.C E5.5 ECC5.8 J39.1 J41.1 J43.4 J43.11 J44.2 R145.2 R146.2 R155.2 R163.2 R164.2 R165.2 TP38.P$1 U23.VDD@36 U23.VDD@37 U24.1 U25.2 U25.3 U25.9 U25.10

## Tracks (layer width: path | path; a pad name or v marks a point on that pad's centre or on a via)
1.8V  (via drill 0.3)
  Top 0.406: U4.5 54.21,9.25 C16.1 TP1.P$1 56.64,9.98 69.95,9.98 v70.53,9.4
  Bottom 0.203: v70.53,9.4 71.32,8.61 77.03,8.61 78.33,9.91 79.17,9.91 79.95,10.69 J7.10
1.8V1  (via drill 0.3)
  Top 0.406: U9.5 54.21,41.51 C28.1 TP2.P$1 56.64,42.24 69.95,42.24 v70.53,41.66
  Bottom 0.203: v70.53,41.66 71.32,40.87 77.03,40.87 78.33,42.17 79.17,42.17 79.95,42.95 J16.10
1.8V2  (via drill 0.3)
  Top 0.406: U14.5 54.21,73.77 C48.1 TP19.P$1 56.64,74.5 69.95,74.5 v70.53,73.92
  Bottom 0.203: v70.53,73.92 71.32,73.13 77.03,73.13 78.33,74.43 79.17,74.43 79.95,75.21 J25.10